# Altium PCB PA_Channel_SUP_CTRL_v1.1.PcbDoc (part 1 of 2)
Units mil, origin at the board's own origin, x right, y up, seen from the top; angles counter-clockwise.
Board outline 7464.6 x 1234.28 mil, 2 copper layers (Top Layer, Bottom Layer), stack 61.855 mil thick; 26 components, 28 nets, 132 pads, 178 vias.
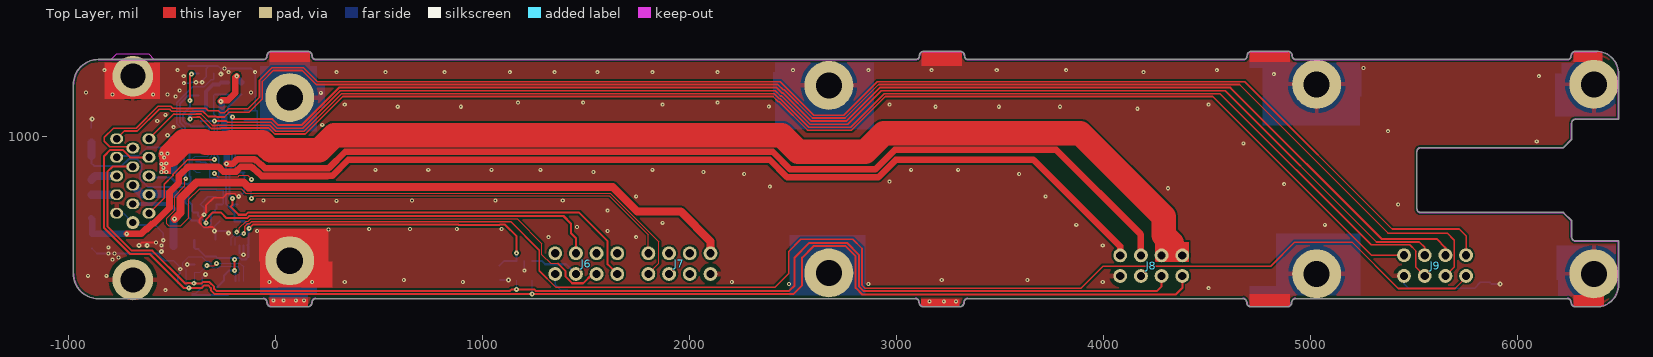
[diagram p0: Top Layer view]
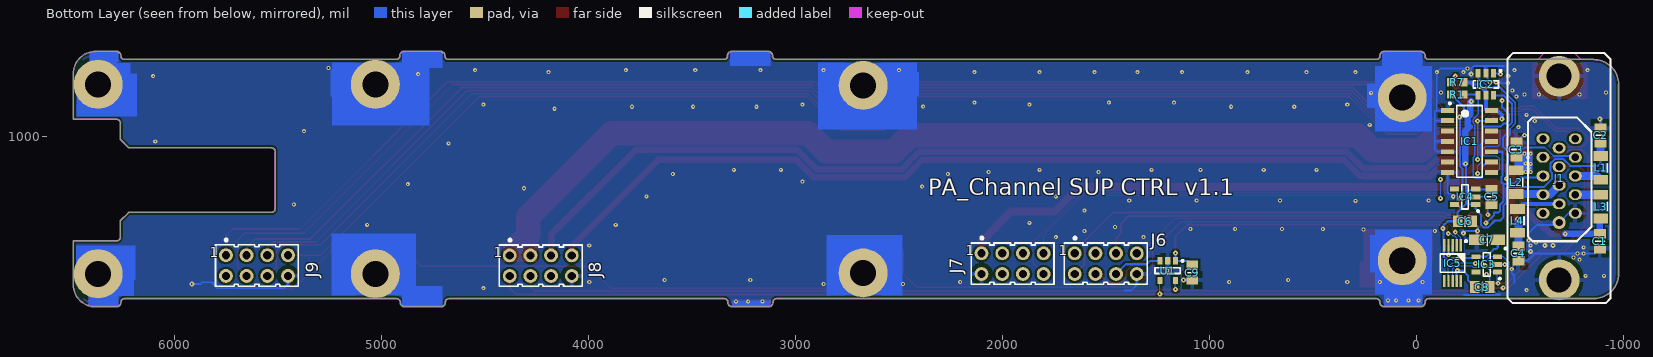
[diagram p1: Bottom Layer view, seen from below]
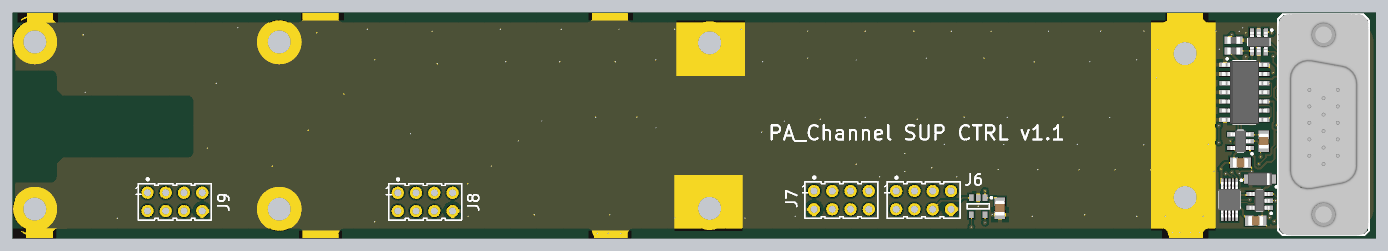
[diagram p2: 3D render of the assembled board from below, using the file's embedded part models]

## Layer stack, top to bottom
Top Solder: solder mask 0.4, Solder Resist, Dk 3.5
Top Layer: signal copper 1.4
Dielectric 1: dielectric 59.0551, FR-4, Dk 4.8
Bottom Layer: signal copper 1.4
Bottom Solder: solder mask 0.4, Solder Resist, Dk 3.5

## Board outline
-19.69,175.18 cw(c-19.69,196.85) -41.35,196.85 cw(c-39.37,196.85) -41.35,196.87 ccw(c-59.06,196.85) -59.06,214.55 cw(c-59.06,216.54) -59.08,214.55 -856.3,214.55 cw(c-856.3,334.65) -975.87,323.46 cw(c-974.41,324.8) -976.39,324.8 -976.39,1250 cw(c-856.3,1250) -856.3,1370.09 -59.06,1370.09 cw(c-59.06,1368.11) -59.03,1370.09 cw(c-59.06,1387.8) -59.06,1370.09 -59.03,1370.09 ccw(c-59.06,1387.8) -41.35,1387.78 cw(c-39.37,1387.8) -41.35,1387.8 cw(c-19.69,1387.8) -22.48,1409.28 cw(c-21.65,1407.48) -21.65,1409.46 155.51,1409.46 cw(c155.51,1387.8) 177.18,1387.8 cw(c175.2,1387.8) 177.18,1387.78 ccw(c194.88,1387.8) 194.86,1370.09 cw(c194.88,1368.11) 194.88,1370.09 3092.52,1370.09 ccw(c3092.52,1387.8) 3110.22,1387.78 cw(c3112.2,1387.8) 3110.22,1387.8 cw(c3131.89,1387.8) 3129.09,1409.28 cw(c3129.92,1407.48) 3129.92,1409.46 3307.09,1409.46 cw(c3307.09,1387.8) 3328.76,1387.8 cw(c3326.77,1387.8) 3328.76,1387.78 cw(c3346.46,1387.8) 3328.76,1387.8 3328.76,1387.78 ccw(c3346.46,1387.8) 3346.46,1370.09 4675.2,1370.09 ccw(c4675.2,1387.8) 4692.9,1387.78 cw(c4694.88,1387.8) 4692.9,1387.8 cw(c4714.57,1387.8) 4711.77,1409.28 cw(c4712.6,1407.48) 4712.6,1409.46 4889.76,1409.46 cw(c4889.76,1387.8) 4911.43,1387.8 cw(c4909.45,1387.8) 4911.43,1387.78 cw(c4929.13,1387.8) 4911.43,1387.8 4911.43,1387.78 ccw(c4929.13,1387.8) 4929.13,1370.09 6240.16,1370.09 ccw(c6240.16,1387.8) 6257.86,1387.78 ccw(c6240.16,1387.8) 6257.86,1387.8 cw(c6279.53,1387.8) 6279.53,1409.46 6380.9,1409.46 cw(c6380.9,1302.16) 6488.2,1302.16 6488.2,1082.68 cw(c6486.22,1082.68) 6486.22,1080.69 6279.53,1080.69 ccw(c6279.53,1062.99) 6261.83,1062.99 cw(c6259.84,1062.99) 6261.83,1062.97 6261.83,984.25 cw(c6259.84,984.25) 6261.23,982.84 6261.25,982.85 6221.87,943.48 6221.89,943.49 cw(c6220.47,944.88) 6220.47,942.9 5531.5,942.9 ccw(c5531.5,925.2) 5513.79,925.2 5513.79,649.61 ccw(c5531.5,649.61) 5531.5,631.9 6220.47,631.9 cw(c6220.47,629.92) 6221.89,631.31 6221.87,631.32 6261.25,591.95 6261.23,591.97 cw(c6259.84,590.55) 6261.83,590.55 6261.83,511.81 ccw(c6279.53,511.81) 6279.53,494.11 6486.22,494.11 cw(c6486.22,492.13) 6488.2,492.13 cw(c6486.22,492.13) 6488.2,492.1 6488.2,334.65 cw(c6486.22,334.65) 6488.2,334.65 ccw(c6486.22,334.65) 6488.2,334.67 6488.2,334.65 6488.2,281.1 cw(c6486.22,281.1) 6487.92,280.08 cw(c6382,281.1) 6382,175.18 6279.53,175.18 cw(c6279.53,196.85) 6257.86,196.85 cw(c6259.84,196.85) 6257.86,196.87 ccw(c6240.16,196.85) 6240.16,214.55 4927.17,214.55 ccw(c4927.17,196.85) 4909.46,196.87 cw(c4907.48,196.85) 4909.46,196.85 cw(c4887.8,196.85) 4890.59,175.36 cw(c4889.76,177.17) 4889.76,175.18 4712.6,175.18 cw(c4712.6,196.85) 4690.93,196.85 cw(c4692.91,196.85) 4690.93,196.87 cw(c4673.23,196.85) 4690.93,196.85 4690.93,196.87 ccw(c4673.23,196.85) 4673.23,214.55 3344.49,214.55 ccw(c3344.49,196.85) 3326.79,196.87 ccw(c3344.49,196.85) 3326.79,196.85 cw(c3305.12,196.85) 3307.91,175.36 cw(c3307.09,177.17) 3307.09,175.18 3129.92,175.18 cw(c3129.92,196.85) 3108.25,196.85 cw(c3110.24,196.85) 3108.25,196.87 ccw(c3090.55,196.85) 3090.55,214.55 194.88,214.55 ccw(c194.88,216.54) 194.9,214.55 194.88,214.55 ccw(c194.88,196.85) 177.18,196.87 cw(c175.2,196.85) 177.18,196.85 cw(c155.51,196.85) 158.31,175.36 cw(c157.48,177.17) 157.48,175.18

## Design rules (kind name [scope] priority, off if disabled: settings)
AcuteAngle [All] p1: minimum=6.00000000000000E+0001 checktracksonly=FALSE
Clearance Clearance_poly [(InPolygon)] p1: gap=10 ignorepadtopadclearanceinfootprint=FALSE except(0: Arc-Hole Track-Hole SMDPad-Hole THPad-Hole Via-Hole Fill-Hole Poly-Hole Region-Hole Text-Hole)
Clearance [All] p2: gap=6 ignorepadtopadclearanceinfootprint=FALSE except(0: Arc-Hole Track-Hole SMDPad-Hole THPad-Hole Via-Hole Fill-Hole Poly-Hole Region-Hole Text-Hole)
ComponentClearance [All] p1 off: gap=10 collisioncheckmode=3 verticalgap=10 showdistances=FALSE
DiffPairsRouting [All] p1: maxlimit=20 minlimit=15 mostfreqgap=17 toplayer_minwidth=15 toplayer_maxwidth=15 toplayer_prefwidth=15 bottomlayer_minwidth=15 bottomlayer_maxwidth=15 bottomlayer_prefwidth=15 maxuncoupledlength=500
Height [All] p1 off: minheight=0 maxheight=1000 prefheight=500
HoleSize [All] p1: absolutevalues=TRUE maxlimit=200 minlimit=1 maxpercent=80.000 minpercent=20.000
MinimumSolderMaskSliver [All] p1: minsoldermaskwidth=0
MinimumSolderMaskSliver SilkscreenOverComponentPads [All] p2: minsoldermaskwidth=0
PlaneClearance [All] p1: clearance=8
PlaneConnect PlaneConnect_pad [(InPadClass('All Pads'))] p1: planeconnectstyle=Relief reliefexpansion=20 reliefentries=4 reliefconductorwidth=10 reliefairgap=10
PlaneConnect [All] p2: planeconnectstyle=Direct reliefexpansion=20 reliefentries=4 reliefconductorwidth=10 reliefairgap=10
PolygonConnect PolygonConnect_pad [(InPadClass('All Pads'))] p1: connectstyle=Relief reliefconductorwidth=20 reliefentries=4 polygonreliefangle="90 Angle" airgapwidth=20
PolygonConnect PolygonConnect_pad_1 [HasFootprint('No Footprint')] p2: connectstyle=Relief reliefconductorwidth=20 reliefentries=4 polygonreliefangle="90 Angle" airgapwidth=20
PolygonConnect [All] p3: connectstyle=Direct reliefconductorwidth=10 reliefentries=4 polygonreliefangle="90 Angle" airgapwidth=10
RoomDefinition "PA_Channel_SUP_CTRL v1.1" [InComponentClass('PA_Channel_SUP_CTRL v1.1')] p1 off: confinementstyle=ConfineIn formatcopy=TRUE lockcomponents=FALSE outline -1747.09,-3039.88 252.91,-3039.88 252.91,-2039.88 -1747.09,-2039.88
RoutingVias [All] p1: holewidth=7.87 width=19.68 viastyle="Through Hole" minholewidth=7.87 minwidth=19.68 maxholewidth=19.68 maxwidth=39.37
SilkToSilkClearance [All] p1: silktosilkclearance=0
SilkToSolderMaskClearance [IsPad] p1: minsilkscreentomaskgap=1 clearancetoexposedcopper=TRUE
SolderMaskExpansion [All] p1: expansion=4
ViasUnderSMD ViasUnderSMD_allow [InComponent('IC18') or InComponent('IC10') or InComponent('IC13') or InComponent('IC14') or InComponent('IC15')] p1: allowed=TRUE
ViasUnderSMD [All] p2: allowed=FALSE
Width Width_1 [(InDifferentialPairClass('All Differential Pairs'))] p1: maxlimit=8 minlimit=8 preferedwidth=8
Width [All] p2: maxlimit=236.22 minlimit=6 preferedwidth=10
21 further rules are at their usual default settings.

## Components (designator, comment, footprint, x,y, rotation, side; value= is the part's Value field where it differs from the comment)
C1 "1uF" CAPC2012X110N -885.83,492.13 r90 bottom
C2 "1uF" CAPC2012X110N -889.23,1003.94 r270 bottom
C3 "1uF" CAPC2012X110N -482.28,935.04 r270 bottom
C4 "1uF" CAPC2012X110N -492.13,433.07 r90 bottom
C5 "1uF" CAPC2012X140N -362.2,706.69 r90 bottom
C6 "1uF" CAPC2012X140N -234.25,588.58 r0 bottom
C7 "10uF" CAPMP3216X180N -341,499 r0 bottom
C8 "1uF" CAPC2012X140N -317.48,271 r0 bottom
C9 "1uF" CAPC2012X140N 1083,340 r90 bottom
IC1 "SN74LVC32AD" SOIC127P600X175-14N -255.91,974.41 r180 bottom
IC2 "SN74LVC2G04DBVR" SOT95P280X145-6N -334.65,1250 r270 bottom
IC3 "24AA02E48T-I/OT" SOT95P280X145-5N -339,380 r0 bottom
IC4 "NCP703SN33T1G" SOT95P275X110-5N -234.25,706.69 r0 bottom
IC5 "AD5627RBRMZ-1" SOP50P490X110-10N -174,386 r270 bottom
J1 "HD-Sub" TYCO_5750489-1 -688.98,797.24 r90 bottom locked
J6 "Header 8" ZL2019-8_MIRR 1501.18,383.86 r180 top locked
J7 "Header 8" ZL2019-8_MIRR 1951.18,383.86 r180 top locked
J8 "Header 8" ZL2019-8_MIRR 4230.32,374.02 r180 top locked
J9 "Header 8" ZL2019-8_MIRR 5601.18,374.65 r180 top locked
L1 "600R@100MHz" INDC3216X130N -889.23,846.46 r270 bottom
L2 "600R@100MHz" INDC3216X130N -482.28,777.56 r90 bottom
L3 "600R@100MHz" INDC3216X130N -889.23,659.45 r90 bottom
L4 "600R@100MHz" INDC3216X130N -487.65,590.55 r270 bottom
R1 "0" RESC1608X55N -196.85,1200.79 r180 bottom
R7 "0" RESC1608X55N -196.85,1259.84 r0 bottom
U1 "MCP3221A5T-I/OT" SOT-23-OT5_L 1202,350 r270 bottom

## Footprints (in the part's own frame and the unit in brackets; to place one, negate y for a bottom-side part, rotate by r counter-clockwise, add the part's x,y. Pads: shape width x height; smd on the part's side, far side on the other; paste and mask are expansions set on the pad)
CAPC2012X110N [mm] "Chip Capacitor, Body 2.0x1.25mm, IPC Medium Density"
  rect 1.15x1.45 smd: 1(-0.9,0) 2(0.9,0)
  silkscreen extent 0,-0.58 0,0.58, body extent -1.05,-0.67 1.05,0.68, height 1.1
CAPC2012X140N [mm] "Chip Capacitor, Body 2.0x1.25mm, IPC Medium Density"
  rect 1.15x1.45 smd: 1(-0.9,0) 2(0.9,0)
  silkscreen extent 0,-0.58 0,0.58, body extent -1.05,-0.67 1.05,0.68, height 1.3
CAPMP3216X180N [mm] "Capacitor, Polarized, Molded  Body 3.2x1.6mm, IPC Medium Density"
  rect 1.8x1.25 smd: 1(-1.3,0) 2(1.3,0)
  silkscreen extent -2.4,-0.7 0,1.2, body extent -1.7,-0.9 1.7,0.9, height 1.6
INDC3216X130N [mm] "Chip Inductor, EIA 1206, Metric 3216, 3.20mm L X 1.60mm W, IPC Medium Density"
  rect 1.2x1.8 smd: 1(-1.45,0) 2(1.45,0)
  silkscreen extent -0.5,-0.8 0.5,0.8, body extent -1.7,-0.9 1.7,0.9, height 1.3
RESC1608X55N [mm] "Chip Resistor, EIA 0603, Metric 1608, Body 1.6x0.8mm, IPC Medium Density"
  rect 0.9x1 smd: 1(-0.8,0) 2(0.8,0)
  body extent -0.87,-0.47 0.88,0.48, height 0.55
SOIC127P600X175-14N [mm] "SOIC 14, Pitch 1.27mm - Body 4x8.75mm, IPC Medium Density"
  rect 1.55x0.6 smd: 1(-2.7,3.81) 2(-2.7,2.54) 3(-2.7,1.27) 4(-2.7,0) 5(-2.7,-1.27) 6(-2.7,-2.54) 7(-2.7,-3.81) 8(2.7,-3.81) 9(2.7,-2.54) 10(2.7,-1.27) 11(2.7,0) 12(2.7,1.27) 13(2.7,2.54) 14(2.7,3.81)
  silkscreen extent -2.53,-4.4 1.55,4.78, body extent -3.1,-4.37 3.1,4.38, height 1.75
SOP50P490X110-10N [mm] "MSOP, 10-Leads, Body 3.1x3.1mm (max), Pitch 0.50mm, IPC Medium Density"
  rect 1.5x0.3 smd: 1(-2.2,1) 2(-2.2,0.5) 3(-2.2,0) 4(-2.2,-0.5) 5(-2.2,-1) 6(2.2,-1) 7(2.2,-0.5) 8(2.2,0) 9(2.2,0.5) 10(2.2,1)
  silkscreen extent -2.82,-1.5 1.12,1.77, body extent -2.45,-1.55 2.45,1.55, height 1.1
SOT95P275X110-5N [mm] "SOT, 0.95mm Pitch; 5 Pin, 1.50mm W X 3.00mm L X 1.10mm H Body, IPC Medium Density"
  rect 1.15x0.6 smd: 1(-1.3,0.95) 2(-1.3,0) 3(-1.3,-0.95) 4(1.3,-0.95) 5(1.3,0.95)
  silkscreen extent -1.72,-1.5 0.4,1.87, body extent -1.37,-1.5 1.37,1.5, height 1.1
SOT95P280X145-5N [mm] "SOT, 0.95mm pitch; 5 pin, 1.60mm W X 2.90mm L X 1.45mm H body, IPC Medium Density"
  rect 1.1x0.6 smd: 1(-1.3,0.95) 2(-1.3,0) 3(-1.3,-0.95) 4(1.3,-0.95) 5(1.3,0.95)
  silkscreen extent -1.72,-1.45 0.43,1.87, body extent -1.4,-1.5 1.4,1.5, height 1.45
SOT95P280X145-6N [mm] "SOT23, 6-Leads, Body 1.6x3.0mm, Pitch 0.95mm, IPC Medium Density"
  rect 1.05x0.6 smd: 1(-1.35,0.95) 2(-1.35,0) 3(-1.35,-0.95) 4(1.35,-0.95) 5(1.35,0) 6(1.35,0.95)
  silkscreen extent -1.77,-1.55 0.45,1.92, body extent -1.4,-1.5 1.4,1.5, height 1.45
SOT-23-OT5_L [mm] "SOT23, 5-Leads, Body 2.9x1.7mm, Pitch 0.95mm, Lead Span 2.8mm, IPC High Density"
  rect 0.9x0.65 smd: 1(-1.2,0.95) 2(-1.2,0) 3(-1.2,-0.95) 4(1.2,-0.95) 5(1.2,0.95)
  silkscreen extent -1.32,-1.55 0.35,1.95, body extent -0.9,-1.55 0.9,1.55, height 1.45
TYCO_5750489-1 [mm]
  oval 1.3x1.6 hole 0.9: 1(-4.318,1.98) 2(-2.032,1.98) 3(0.254,1.98) 4(2.54,1.98) 5(4.826,1.98) 7(-3.175,0) 8(-0.889,0) 9(1.397,0) 10(3.683,0) 11(-4.318,-1.98) 12(-2.032,-1.98) 13(0.254,-1.98) 14(2.54,-1.98) 15(4.826,-1.98)
  round 1.6 hole 0.9: 6(-5.461,0)
  round 5 hole 3.07: 16(12.497,0) 17(-12.497,0)
  silkscreen extent -15.35,-6.3 15.35,6.34, body extent -15.4,-6.25 15.4,6.25, height 12.11
ZL2019-8_MIRR [mm]
  round 1.7 hole 1: 1(-3.81,-1.27) 2(-3.81,1.27) 3(-1.27,-1.27) 4(-1.27,1.27) 5(1.27,-1.27) 6(1.27,1.27) 7(3.81,-1.27) 8(3.81,1.27)
  body extent -5.08,-2.5 5.08,2.54, height 16.4

## Part data
C1 C2 C3 C4: library part CC0805_1UF_50V_10%_X7R, "Non-polarised capacitor", Case=0805, Manufacturer=GENERIC, Manufacturer1 ComponentHeight=1.1mm, Manufacturer1 Example=KEMET, Manufacturer1 Part Number=C0805C105K5RACTU, Tolerance=±10%, Voltage=50V, Author="CERN DEM JLC", Component Type=Standard, CreateDate=04.12.2013, HelpURL=\\cern.ch\dfs\Applications\Altium\Datasheets\CC0805_X7R_KEMET.pdf, LatestRevisionDate=04.12.2013, Manufacturer Part Number=CC0805_1UF_50V_10%_X7R, Mounted=Yes, Part Description="SMD Multilayer Chip Ceramic Capacitor", Part Number=CC0805_1UF_50V_10%_X7R, Pin Count=2, Sense=No, SMD=Yes, Socket=No, Status=Preferred, TC=X7R
C5 C6 C8 C9: library part CC0805_1UF_35V_20%_X7R, "Non-polarised capacitor", Case=0805, Manufacturer=GENERIC, Manufacturer1 ComponentHeight=1.35mm, Manufacturer1 Example="TAIYO YUDEN", Manufacturer1 Part Number=GMK212B7105MG-T, Tolerance=±20%, Voltage=35V, Author="CERN DEM JLC", Component Type=Standard, CreateDate=22.06.2011, HelpURL=\\cern.ch\dfs\Applications\Altium\Datasheets\CC0805_X7R_TAIYO-YUDEN_HIGH-VALUE.pdf, LatestRevisionDate=22.06.2011, Manufacturer Part Number=CC0805_1UF_35V_20%_X7R, Mounted=Yes, Part Description="SMD Multilayer Chip Ceramic Capacitor", Part Number=CC0805_1UF_35V_20%_X7R, Pin Count=2, Sense=No, SMD=Yes, Socket=No, Status="Not Recommended", TC=X7R
C7: library part CTE3216-18_10UF_16V_20%_AVX_TCJ, "Polarised capacitor", Case=A, Manufacturer=AVX, Manufacturer Part Number=TCJA106M016R0200, Tolerance=±20%, Voltage=16V, Author="CERN DEM JLC", ComponentHeight=1.8mm, Component Type=Standard, CreateDate=29.03.2012, HelpURL=\\cern.ch\dfs\Applications\Altium\Datasheets\CTE_AVX_TCJ.pdf, LatestRevisionDate=29.03.2012, Mounted=Yes, Part Description="ESR 0R200 Tantalum Solid Electrolytic Chip Capacitor with Conductive Polymer Electrode", Part Number=CTE3216-18_10UF_16V_20%_AVX_TCJ, Pin Count=2, Sense=No, SMD=Yes, Socket=No, Status=Preferred
IC1: "Quad 2-Input OR Gate", Case=SOIC14, Manufacturer="TEXAS INSTRUMENTS", Author="CERN DEM JLC", Bonding=No, ComponentHeight=1.75mm, Component Type=Standard, CreateDate=21.03.2012, Device=SN74LVC32AD, HelpURL=\\cern.ch\dfs\Applications\Altium\Datasheets\SN74LVC32AD.pdf, LatestRevisionDate=21.03.2012, Manufacturer Part Number=SN74LVC32AD, Mounted=Yes, PackageDescription="SOIC 14, Pitch 1.27mm - Body 4x8.75mm, IPC Medium Density", Part Description="Quad 2-Input Positive-OR Gate", Part Number=SN74LVC32AD, Pin Count=14, PressFit=No, Sense=No, SMD=Yes, Socket=No
IC2: "Dual Inverter Buffer", Case=SOT23-6, Manufacturer="TEXAS INSTRUMENTS", Author="CERN DEM JMW", Bonding=No, ComponentHeight=1.45mm, Component Type=Standard, CreateDate=26.08.2016, Device=SN74LVC2G04DBVR, HelpURL=\\cern.ch\dfs\Applications\Altium\Datasheets\SN74LVC2G04DBVR.pdf, LatestRevisionDate=26.08.2016, Manufacturer Part Number=SN74LVC2G04DBVR, Mounted=Yes, PackageDescription="SOT23, 6-Leads, Body 1.6x3.0mm, Pitch 0.95mm, IPC Medium Density", Part Description="Dual Inverter Gate", Part Number=SN74LVC2G04DBVR, Pin Count=6, PressFit=No, Sense=No, SMD=Yes, Socket=No
IC3: "1.7V-5.5V, 2K I2C Serial EEPROM With EUI-48 Node Identity", Case=SOT23-5, Manufacturer="MICROCHIP TECHNOLOGY", Author="CERN DEM MR", Bonding=No, ComponentHeight=1.45mm, Component Type=Standard, CreateDate=2016-03-31, Device=24AA02E48T-I/OT, HelpURL=\\cern.ch\dfs\Applications\Altium\Datasheets\24AA02E48T-I-OT.pdf, LatestRevisionDate=2016-03-31, Manufacturer Part Number=24AA02E48T-I/OT, Mounted=Yes, PackageDescription="SOT, 0.95mm pitch; 5 pin, 1.60mm W X 2.90mm L X 1.45mm H body, IPC Medium Density", Part Description="1.7V-5.5V, 2K I2C Serial EEPROM With EUI-48 Node Identity", Part Number=24AA02E48T-I/OT, Pin Count=5, PressFit=No, Sense=No, SMD=Yes, Socket=No
IC4: "3.3V 300mA, Ultra-Low Quiescent Current, IQ 12uA, Ultra-Low Noise, LDO Voltage Regulator", Case=SOT23-5, Manufacturer="ON SEMICONDUCTOR", Author="CERN DEM JLC", Bonding=No, ComponentHeight=1.1mm, Component Type=Standard, CreateDate=16.02.2017, Device=NCP703SN33T1G, HelpURL=\\cern.ch\dfs\Applications\Altium\Datasheets\NCP703SN33T1G.pdf, LatestRevisionDate=16.02.2017, Manufacturer Part Number=NCP703SN33T1G, Mounted=Yes, PackageDescription="SOT, 0.95mm Pitch; 5 Pin, 1.50mm W X 3.00mm L X 1.10mm H Body, IPC Medium Density", Part Description="3.3V 300mA, Ultra-Low Quiescent Current, IQ 12uA, Ultra-Low Noise, LDO Voltage Regulator", Part Number=NCP703SN33T1G, Pin Count=5, PressFit=No, Sense=No, SMD=Yes, Socket=No
IC5: "Dual, 12-/14-/16-Bit nanoDACs® with 5 ppm/°C On-Chip Reference, I2C Interface", Case=MSOP10, Manufacturer="ANALOG DEVICES", Author="CERN DEM JLC", Bonding=No, ComponentHeight=1.1mm, Component Type=Standard, CreateDate=18.12.2013, Device=AD5627RBRMZ-1, HelpURL=\\cern.ch\dfs\Applications\Altium\Datasheets\AD5627RBRMZ-1.pdf, LatestRevisionDate=18.12.2013, Manufacturer Part Number=AD5627RBRMZ-1, Mounted=Yes, PackageDescription="TSSOP, 10-Leads, Body 3.2x3.2mm (max), Pitch 0.50mm, IPC Medium Density", Part Description="Dual, 12-Bit nanoDACs® with 5 ppm/°C On-Chip Reference, I2C Interface", Part Number=AD5627RBRMZ-1, Pin Count=10, PressFit=No, Sense=No, SMD=Yes, Socket=No
J1: "Connector High Density D-sub 15 Male", Manufacturer="TYCO ELECTRONICS", Manufacturer Part Number=5750489-1, Part Number=TYCO_5750489-1, Author=GK, ComponentHeight=12.75mm, Component Type=Standard, CreateDate=26.06.2013, Family=HD-Sub, HelpURL=\\cern.ch\dfs\Applications\Altium\Datasheets\TYCO_1-1734530-1.pdf, LatestRevisionDate=26.06.2013, Mounted=Yes, Part Description="15 Male Contacts, Straight High Density D-SUB Connector, AMPLIMITE HD-22 Serie", Pin Count=17, PressFit=No, Sense=No, SMD=No, Socket=No, Status=None
J6 J7 J8 J9: "Connector 8 Male", Manufacturer=NINIGI, Manufacturer Part Number=ZL2019-8, Author=GK, ComponentHeight=19.4, Component Type=Standard, CreateDate=08.03.2017, Family="Header 8", HelpURL=\\cern.ch\dfs\Applications\Altium\Datasheets\SAMTEC_TSW-104-23-L-D.pdf, LatestRevisionDate=08.03.2017, Mounted=Yes, Part Description="8 Contacts, Pitch 2.54mm, Dual Row  Through Mount Straight Header (Post Lead 5.84mm, Tail Lead 2.92mm, Insulator 2.54mm)", Part Number=ZL2019-8, Pin Count=8, PressFit=No, Sense=No, SMD=No, Socket=No, Status=None
L1 L2 L3 L4: library part IND1206_WURTH_74279218, "Inductor", Case=1206, Manufacturer="WURTH ELEKTRONIK", Manufacturer Part Number=74279218, Power=2A, Resistance=0.1R, Tolerance=±25%, Author="CERN DEM JLC", ComponentHeight=1.3mm, Component Type=Standard, CreateDate=24.01.2012, HelpURL=\\cern.ch\dfs\Applications\Altium\Datasheets\IND1206_WURTH_74279218.pdf, LatestRevisionDate=24.01.2012, Mounted=Yes, Part Description="SMD EMI Suppression Chip Ferrite Bead (WE-CBF Series)", Part Number=IND1206_WURTH_74279218, Pin Count=2, Sense=No, SMD=Yes, Socket=No, Status=None
R1 R7: library part R0603_0R_JUMPER, "Resistor", Case=0603, Manufacturer=GENERIC, Manufacturer1 ComponentHeight=0.55mm, Manufacturer1 Example="NIC COMPONENT", Manufacturer1 Part Number=NRC06Z0, Author="CERN DEM JLC", Component Type=Standard, CreateDate=03.12.2007, HelpURL=\\cern.ch\dfs\Applications\Altium\Datasheets\R0603_NIC_NRC.pdf, LatestRevisionDate=13.03.2008, Manufacturer Part Number=R0603_0R_JUMPER, Mounted=Yes, Part Description="1A (0.05R Max DC Resistance) Zero Ohm Jumper", Part Number=R0603_0R_JUMPER, Pin Count=2, PressFit=No, Sense=No, SMD=Yes, Socket=No, Status=Preferred
U1: library part CMP-0188-00733-2, "Low Power 12-Bit A/D Converter With I2C Interface, 5-Pin SOT-23, Industrial Temperature, Tape and Reel", Code_IPC=SOT23-5, ComponentLink1Description="Manufacturer URL", ComponentLink1URL=http://www.microchip.com/, ComponentLink2Description=Datasheet, ComponentLink2URL=http://ww1.microchip.com/downloads/en/DeviceDoc/21732c.pdf, ComponentLink3Description="Package Specification", ComponentLink3URL=http://www.microchip.com/stellent/groups/techpub_sg/documents/packagingspec/en012702.pdf, DatasheetVersion="revC, Jul-2006", PackageDescription="5-Lead Plastic Small Outline Transistor (OT) [SOT-23]", PackageReference=SOT-23-OT5, PackageVersion="revBB, Aug-2009", RevisionNote="URLs added."

## Free pads (board coordinates)
  round 236.22 hole 125.98 unplated: 0(5029.53,334.65) 5(5029.53,1250) 7(6368.11,334.65) 10(6368.11,1250) 14(69,398) 14(69,1186)
  round 236.22 hole 125.98: 15(2673,339) 15(2673,1245)

## Via types
v1: diameter 19.68, hole 7.87, Top Layer to Bottom Layer, tented both sides, 132 vias
v2: diameter 23.62, hole 7.87, Top Layer to Bottom Layer, tented both sides, 46 vias

## Nets (pads, with @x,y where several pads share a name; then routed paths per layer and width w, separated by ;. In a path a pad name is that pad's centre, name@x,y a point inside that pad or via, vN(x,y) a via of type N, cw(c..) or ccw(c..) an arc to the next point about the centre after c; other vN are vias at no path point)
ADL_Q: IC1.10 J1.3 J6.5 | length 2640.3
  Top Layer w10: v2(-334.64,580.71) -334.64,597.66 -321.68,610.63 -321.68,613.36 -305.12,629.92 -262.57,629.92 -236.73,604.08 -136.14,604.08 -126.32,613.9 1391.13,613.9 1427.03,578 1427.03,531.63 1451.18,507.48 J6.5
  Bottom Layer w10: J1.3 -611.02,800.02 -504.75,800.02 -475.82,771.09 -435.67,771.09 -432.62,768.04 -420.17,768.04 -419.84,767.72 ; IC1.10 -414.17,924.41 -415.97,922.61 -415.97,809.06 -410.26,803.35 -410.26,777.95 -419.84,768.37 -419.84,767.72 ; v2(-334.64,580.71) -337.38,580.71 -374.02,617.35 -374.02,629.92 -393.7,629.92 -403.54,639.76 -403.54,669.76 -419.84,686.06 -419.84,767.72
ALERT: J8.6
FR_PWR: J1.5 J9.6 | length 6869.6
  Top Layer w8: J1.5 -491.75,1106.52 -490.2,1106.52 -489.25,1105.57 -386.18,1105.57 -385.23,1106.52 -359.81,1106.52 -304.31,1051.02 -286.24,1051.02 -284.5,1052.76 -27.24,1052.76 1.79,1023.73 137.79,1023.73 319,1204.94 2408.77,1204.94 2433.88,1179.84 2439.02,1179.84 2575.84,1043.02 2778.27,1043.02 2940.2,1204.94 4562.77,1204.94 5293.07,474.65 5479.45,474.65 5509.58,444.51 5507.72,442.65 5507.72,367.64 5511.18,364.17 5511.65,364.17 J9.6
FR_Q: IC1.13 J1.1 J9.5 | length 7144.2
  Top Layer w8: J1.1 -537.56,700.71 -537.56,767.26 -494.92,809.9 -494.92,815.93 -425.02,885.83 -295.28,885.83 -295,886.1 v2(-295,887) ; v2(-295.28,1072.83) -237.54,1072.83 -231.47,1066.76 -21.45,1066.76 7.59,1037.73 131.99,1037.73 313.21,1218.94 2414.57,1218.94 2439.68,1193.84 2444.82,1193.84 2581.64,1057.02 2763.79,1057.02 2925.72,1218.94 4588.14,1218.94 5318.44,488.65 5525.13,488.65 5551.18,462.6 J9.5
  Bottom Layer w8: IC1.13 -360.63,1072.83 v2(-295.28,1072.83) -295.53,1072.58 -295.53,885.83 -295,886.35 v2(-295,887)
FR_RST: J6.2 J9.3 R1.1 | length 9111.9
  Top Layer w10: v2(-208.16,698.91) -208.16,667.83 -216.54,659.45 -177.17,620.08 -142.77,620.08 -132.95,629.9 1466.56,629.9 1604.33,492.13 1604.33,380.87 1651.18,334.02 J6.2 ; v2(-206.69,1092.52) -206.69,1084.54 -203.92,1081.76 -15.23,1081.76 13.8,1052.73 125.78,1052.73 306.99,1233.94 2420.79,1233.94 2445.89,1208.84 2451.03,1208.84 2587.86,1072.02 2757.58,1072.02 2919.51,1233.94 4612.51,1233.94 5342.81,503.65 5608.56,503.65 5651.18,461.02 J9.3
  Bottom Layer w10: v2(-208.16,698.91) -208.16,701.63 -221.69,715.17 -221.69,842.84 -209.47,855.06 -209.47,1091.94 -229.16,1111.62 -229.16,1138.9 -167.27,1200.79 R1.1
FR_VREF: IC5.2 J9.2 | length 6794.2
  Top Layer w7.87: v2(-153,529) -148.75,533.25 -148.75,563.01 -136.01,575.75 -126.38,575.75 -115.16,586.96 1136.04,586.96 1274.06,448.94 1274.06,349.6 1354.66,269 2412,269 2479,336 2479,443 2537,501 2789,501 2833.05,456.95 2833.05,279.95 2847.35,265.65 3890.65,265.65 3997,372 4808,372 4924,488 5200,488 5424,264 5698,264 5751.18,317.18 J9.2
  Bottom Layer w6: IC5.2 -193.69,507.32 -185.81,515.19 -178.38,515.19 -164.57,529 v2(-153,529)
GND: C1.1 C2.1 C3.1 C4.1 C5.1 C6.1 C7.2 C8.1 C9.1 IC1.1 IC1.2 IC1.4 IC1.5 IC1.7 IC2.2 IC3.2 IC4.2 IC5.3 IC5.4 J1.6 J1.11 J1.16 J1.17 J6.8 J7.2 J8.8 J9.8 pad.0 pad.5 pad.7 pad.10 pad.14 pad.15 U1.2 | length 4494.2
  Top Layer w8: v2(-659.45,472.44) -645.73,486.16 -620.08,486.16 ; v2(-620.08,472.44) -620.08,486.16 ; v1(-576.89,486.16) -620.08,486.16 ; v2(-295.28,541.34) -295.28,553.15 -303.15,561.02 -323.48,561.02 -325.61,558.9 -345.09,558.9 -366.91,580.71 -366.91,597.66 v2(-344.49,620.08) -335.62,628.94 -335.62,665.36 -298.13,702.85 -253.19,702.85 -235.32,720.72 -196.33,720.72 -186.34,710.74 -186.34,706.22 -182.97,702.85 v2(-177.17,708.66)
  Bottom Layer w8: C2.1 -889.23,1079.27 v2(-885.83,1082.68) ; C1.1 -862.2,433.07 v1(-807.09,433.07) v1(-777.56,433.07) -561.02,433.07 -561.02,423.23 -535.43,397.64 C4.1 -460,365.51 v1(-460,357) -460,337.24 -472.44,324.8 -472.44,290.6 ; J1.11 -733.98,627.24 J1.6 -677.6,570.87 -580.71,570.87 -542,532.16 v1(-542,497) -542,452.09 v2(-551.18,442.91) ; v2(-521.65,1003.94) -515.75,1003.94 C3.1 ; v1(-442.25,1255.64) -409.72,1255.64 -405.51,1259.84 v2(-383.86,1259.84) ; v2(-426,380) IC3.2 ; -423.23,1338.58 -320.87,1338.58 ; -403,232 -402.54,232.46 -229.54,232.46 -229,233 ; -403,238 -385.91,238 C8.1 -352.91,317.09 v2(-338,332) ; v2(-354.33,1259.84) -354.33,1267.72 -334.65,1287.4 IC2.2 -334.65,1324.8 -320.87,1338.58 ; v2(-344.49,620.08) -344.49,653.54 C5.1 -326.77,706.69 IC4.2 ; C7.2 -289.82,535.88 v2(-295.28,541.34) ; C6.1 -295.28,562.99 v2(-295.28,541.34) ; v2(-263.78,1299.21) -263.78,1326.77 ; v2(-226.38,531.5) -236.22,541.34 v2(-295.28,541.34) ; IC5.3 -174,435 -165.69,426.68 v2(-154.32,426.68) IC5.4 ; IC1.4 -88.58,974.41 ; IC1.2 -90.16,1074.41 -88.58,1072.83 ; IC1.1 -147.24,1122.05 -98.43,1122.05 ; C9.1 v2(1125.57,304.57) ; v1(1202,350) U1.2 ; J6.8 1351.18,282.68 1379.4,254.46 1411.12,254.46 ; J9.8 5451.18,287.01 5462.6,275.59 5472.44,265.75 5792.28,265.75 5819.84,293.31 5866.14,293.31 5874.02,285.43 v2(5915.35,285.43) ; -320.87,1338.58 -275.59,1338.58 -263.78,1326.77 ; -263.78,1326.77 v1(-246.06,1326.77) -116.14,1326.77 v1(-98.43,1309.06) -98.43,1122.05 ; v2(-177.17,708.66) -177.17,697.04 v2(-177.17,708.66) ; v2(-177.17,708.66) -163.54,722.28 -156.29,722.28 -150.43,728.14 -150.43,796.42 -149.61,797.24 -149.61,808.66 -157.48,816.54 IC1.7 -192.52,824.41 -194.88,826.77 -194.88,848.44 -194.47,848.85 -194.47,917.73 -187.01,925.2 -186.22,924.41 IC1.5 -99.21,924.41 -88.58,935.04 -88.58,974.41 ; -98.43,1122.05 -88.58,1122.05 -88.58,1072.83 ; -88.58,974.41 -88.58,1072.83
  other v1: 3159.45,201.69 3228.87,201.69 3287.4,201.69 -9.84,206.69 39.37,206.69 98.43,206.69 137.8,206.69 -531.5,255.91 4507.87,265.75 2480.32,285.43 2864.17,285.43 -29.53,295.28 177.17,295.28 334.65,295.28 905.51,295.28 2204.72,295.28 3996.06,295.28 620.08,305.12 3218.5,305.12 3631.89,305.12 -905.51,324.8 -816.93,324.8 -787.4,403.54 -757.87,413.39 -807.09,462.6 -551.18,472.44 3996.06,472.44 1318.9,511.81 1742.13,511.81 -88.58,541.34 1604.33,541.34 256,549 452.76,551.18 649.61,551.18 875.98,551.18 1092.52,551.18 1456.69,561.02 3868.11,570.87 5068.9,570.87 1870.08,580.71 1604.33,639.76 5423.23,669.29 295,687 -58.53,688.98 659.45,688.98 1062,689 1387.8,688.98 1742.13,708.66 3720.47,708.66 4311.02,748.03 2388,756 4872.05,767.72 2966,780 2263.78,816.93 3592.52,816.93 1535.43,826.77 2066.93,826.77 482.28,836.61 738.19,836.61 1043.31,836.61 1279.53,836.61 1820.87,836.61 3070.87,836.61 3297.24,836.61 4675.2,964.57 6092.52,974.41 5374.02,1023.62 -492.12,1043.31 226,1054 -570.87,1072.83 -531.5,1102.36 4163.39,1131.89 590.55,1141.73 895.67,1141.73 2383,1142 3188.98,1141.73 3494.09,1141.73 3789.37,1141.73 334.65,1151.57 1870.08,1151.57 4507.87,1151.57 2967,1152 1171.26,1161.42 1486.22,1161.42 2135.83,1161.42 -482.28,1190.94 -787.4,1200.79 -590.55,1200.79 -521.65,1200.79 219,1209 -915.35,1210.63 -118.11,1210.63 -462.6,1220.47 -442.91,1289.37 6102.36,1289.37 4822.83,1299.21 -226.38,1309.06 295.28,1309.06 531.5,1309.06 816.93,1309.06 1131.89,1309.06 1348.43,1309.06 1555.12,1309.06 1820.87,1309.06 2135.83,1309.06 4192.91,1309.06 -826.77,1318.9 -472.44,1318.9 2500,1318.9 2864.17,1318.9 3169.29,1318.9 3484.25,1318.9 3818.9,1318.9 4547.24,1318.9 5255.91,1328.74
IN_VREF: IC5.1 J6.4 | length 2044.8
  Top Layer w6: v2(-187,536) -174,536 -173.81,536.19 -173.81,556.24 -141.37,588.68 -131.73,588.68 -120.52,599.9 1167.1,599.9 1287,480 1287,427 1329,385 1364,385
  Top Layer w10: 1364,385 1400,349 1400,322.16 1433.16,289 1486.32,289 1531.18,333.86 J6.4
  Bottom Layer w6: IC5.1 -213.37,509.63 v2(-187,536)
INPWR: J6.6 U1.3 | length 244.3
  Top Layer w6: J6.6 J6.6@1451.18,340.16
  Bottom Layer w10: U1.3 1286.76,397.24 1303,381 1404.04,381 J6.6
N8V0_CH: C1.2 J8.7 L3.1 | length 5597.3
  Top Layer w31.5: v2(-718.5,527.56) -648.94,527.56 -625.32,551.18 -620.08,551.18 -591.35,579.91 -585.51,579.91 -511.81,653.6 -511.81,728.35 -466.63,773.53 -466.63,807.81 -446.97,827.46 -445.33,827.46 -420.23,852.56 -275.67,852.56 -251.75,828.64 -190.08,828.64 -167.31,851.41 -117.73,851.41 -112.43,846.11 -107.9,846.11 -88.37,826.58 -85.82,826.58 -66.49,807.25 249.62,807.25 250.14,807.78 273.78,807.78 351.83,885.83 2387.15,885.83 2471.47,801.5 2912.53,801.5 2996.85,885.83 3661.42,885.83 4080.32,466.93 J8.7
  Bottom Layer w31.5: L3.1 -885.83,598.96 C1.2 v2(-718.5,527.56)
NetIC1_8: IC1.8 IC1.12 | length 410.5
  Bottom Layer w6: IC1.8 -383.79,824.41 -401.72,842.34 -401.72,889.95 -388.07,903.6 -327.97,903.6 -322.69,908.87 -322.69,939.95 -330.99,948.25 -391.09,948.25 -397.57,954.72 -403.54,954.72 -404.13,955.32 -404.13,1023.03 -402.76,1024.41 IC1.12
NetIC1_9: IC1.9 IC2.4 R1.2 | length 662.5
  Bottom Layer w7.87: IC1.9@-383.86,875.98 -363.78,875.98 IC1.9 -337.09,874.41 -337.09,871.85 -317.02,851.78 -317.02,798.08 -316.75,798.35 -305.11,798.35 -304.01,797.25 -285.99,797.25 -284.89,798.35 -273.25,798.35 -273.25,896.01 -281.59,904.35 -281.59,1055.67 -279.8,1057.46 -279.84,1057.51 -273.53,1063.83 -273.53,1081.84 -297.24,1105.56 IC2.4 -293.31,1200.79 R1.2
NetJ1_2: J1.2 J1.8 L2.1 | length 226.7
  Bottom Layer w39.37: J1.8 -643.98,717.24 J1.2 -607.8,720.47 L2.1
NetJ1_7: J1.7 L4.1 | length 211.5
  Bottom Layer w19.68: J1.7 -512.26,672.24 L4.1
NetJ1_12: J1.12 L3.2 | length 122.6
  Bottom Layer w39.37: L3.2 -767.64,716.54 J1.12
NetJ1_13: J1.13 L1.2 | length 129.7
  Bottom Layer w39.37: L1.2 -871.36,807.24 J1.13
ON_OFF: IC2.3 J1.14 | length 844.1
  Bottom Layer w7.87: J1.14 -760.4,903.77 -661.19,903.77 -620.08,944.88 -521.93,944.88 -514.94,937.9 -465.46,937.9 -462.6,935.04 -452.48,935.04 -443.8,943.72 -443.8,943.99 -433.07,954.72 -433.07,987.8 -451.13,1005.86 -451.13,1034.57 -476.98,1060.41 -476.98,1161.05 -399.93,1238.09 -345.32,1238.09 -310.87,1272.54 -302.26,1272.54 -297.24,1277.56 IC2.3
P3V3: C6.2 C7.1 C8.2 C9.2 IC3.4 IC4.5 IC5.5 IC5.9 J8.5 R7.2 U1.1 | length 8007.2
  Top Layer w10: v2(-197,350) v2(-197,404) ; v2(-127,554) -108.98,572.02 884.62,572.02 886.64,570 1081.86,570 1083.89,572.02 1108.98,572.02 1164.6,516.4 v2(1164.6,434.4)
  Top Layer w31.5: v2(-263.69,1167.97) -258.45,1173.2 -229.16,1173.2 -193.31,1209.05 -193.31,1283.07 v2(-187.01,1289.37) ; v2(-236.22,866.14) -205.61,866.14 -182.84,888.91 -102.2,888.91 -96.9,883.61 -92.37,883.61 -72.84,864.08 -70.29,864.08 -50.96,844.75 234.09,844.75 234.61,845.28 258.25,845.28 337.17,924.2 2401.8,924.2 2487,839 2897,839 2990.98,932.98 3771.75,932.98 4180.32,524.41 J8.5
  Bottom Layer w10: C7.1 -392.18,461.18 -384.72,453.72 -372.37,453.72 -336.05,417.4 IC3.4 -282.1,411.68 v2@-197,411.68 ; C8.2 -248.58,304.46 -248.58,326.18 -224.76,350 v2(-197,350) -193.69,346.68 IC5.9 ; v2(-236.22,866.14) -237.92,867.84 -237.92,670.99 -216.54,649.61 ; v2(-197,404) v2@-197,411.68 ; v2@-197,414.4 v2@-197,411.68 ; IC4.5 -196.85,669.29 -216.54,649.61 ; C9.2 1104.81,397.24 U1.1 v2(1164.6,434.4) ; -216.54,649.61 -198.82,631.89 C6.2 -149.84,588.58 -130.19,568.93 -130.19,477.06 IC5.5 -131.5,469.49 -131.5,417.24 -144.87,403.87 -163.76,403.87 -171.57,411.68 v2@-197,411.68
  Bottom Layer w31.5: v2(-263.69,1167.97) -259.94,1164.22 -259.94,1104.58 -247.84,1092.48 -247.84,1053.19 -254.12,1046.91 -254.12,1046.83 -255.91,1045.04 -236.22,1025.35 v2(-236.22,866.14) ; R7.2@-177.17,1271.65 R7.2
P5V0MP: C2.2 C5.2 IC4.1 IC4.3 L1.1 | length 1285.8
  Bottom Layer w7.87: C5.2 IC4.3@-287.4,742.12 ; IC4.1 -257.87,669.29 -252.86,674.31 -252.86,738.19 -283.47,738.19 IC4.3@-287.4,742.12 ; IC4.3 IC4.3@-287.4,742.12
  Bottom Layer w10: L1.1 -889.23,869.54 -875.98,856.3 -742.57,856.3 -710.04,888.83 -667.91,888.83 -646.48,867.4 -646.48,829.44 -653.52,822.4 -653.52,792.09 -616.53,755.09 -442.29,755.09 -435.85,748.65 -435.85,679.44 -419.54,663.13 -419.54,608.52 -403.54,592.52 -378.72,592.52 -344.09,557.9 -325.2,557.9 -311.83,571.26 -311.83,618.29 -292.33,637.8 -292.32,642.72 -285.43,649.61 IC4.1
  Bottom Layer w39.37: L1.1 C2.2
P6V0_CH: C4.2 J7.1 L4.2 | length 2999.6
  Top Layer w39.37: v2(-487.65,600.39) -458.31,629.73 -458.31,698.51 -381.61,775.21 -167.95,775.21 -153.24,775.21 -131.53,753.5 -130.94,753.5 -130.12,752.69 -119.85,752.69 -119.03,753.5 1629.06,753.5 1747.57,635 1958,635 2101.18,491.82 J7.1
  Bottom Layer w39.37: C4.2 v2@-492.13,590.55
P29V0_CH: C3.2 J8.1 J8.3 L2.2 | length 5256.6
  Top Layer w118.11: -506.89,910 -442.48,974.41 -345.15,974.41 -337.37,966.63 -219.39,966.63 -216.31,969.71 -64.2,969.71 -39.37,944.88 -36.82,944.88 -23.94,932 211.15,932 284.15,1005 2445,1005 2525,925 2849,925 2937.78,1013.78 3887.8,1013.78 4291.34,610.24 4291.34,521.65 4330.71,482.28
  other v1: -551.18,826.77 -527.56,826.77 -541.34,846.46 -551.18,866.14 -527.56,868.11 -537.8,895.67 -551.18,915.35 -521.65,915.35
RFA: IC1.11 IC2.1 J7.7 | length 3078.7
  Top Layer w6: v2(-295,819) -279.9,803.9 -179.83,803.9 -173.72,810 -135,810 v2(-116,791) ; v2(-116,699) -103,712 1613.03,712 1801.18,523.85 J7.7
  Top Layer w10: v2(-413.39,1171.26) -413.39,1291.34 v2(-405.51,1299.21)
  Bottom Layer w6: IC1.11 -324.8,974.41 -324.69,974.41 -308.53,958.25 -308.53,906.07 -316.09,898.51 -316.09,877.2 -295.28,856.39 -295.28,819.28 v2(-295,819) ; v2(-116,699) v2(-116,791)
  Bottom Layer w10: v2(-413.39,1171.26) -413.39,1139.21 -446.04,1106.56 -446.04,1073.23 -432.68,1059.86 -420.1,1059.86 -407.46,1047.22 -320.31,1047.22 -320.31,978.91 -324.8,974.41 ; v2(-405.51,1299.21) -401.57,1303.15 IC2.1
RFB: IC2.6 J7.8 | length 3550.9
  Top Layer w6: v2@-438.19,793.91 -438.19,759.2 -487,710.39 -487,642.39 -526,603.39 -526,577.72 -515.28,567 -457,567 -418,606 -418,694 -365.47,746.53 -165.12,746.53 -142.59,724 -107.97,724 -107.15,724.82 1617.18,724.82 1852,490 1852,384.68 J7.8
  Top Layer w10: v2@-438.19,793.91 v2(-433.07,793.91)
  Bottom Layer w10: v2(-433.07,793.91) -435.85,796.69 -435.85,865.87 -442.74,872.75 -442.74,923.66 -418.13,948.26 -418.13,993.98 -436.2,1012.05 -436.2,1040.76 -462.04,1066.6 -462.04,1154.87 -420.05,1196.85 IC2.6
RFL_PWR: J1.10 J9.1 | length 7528.3
  Top Layer w7.87: J1.10 -695.5,948.77 -801.13,948.77 -826.77,974.41 -826.77,994.09 -782.65,1038.21 -672.95,1038.21 -567.24,1143.92 -505.6,1143.92 -496.13,1134.46 -478.63,1134.46 -477.68,1133.51 -397.75,1133.51 -396.81,1134.46 -337.21,1134.46 -324.8,1122.05 -275.59,1122.05 -265.75,1112.2 -246.06,1112.2 -226.75,1131.52 -132.48,1131.52 -76.94,1187.06 -76.94,1269.77 -15.77,1330.94 134.77,1330.94 202.83,1262.88 2437.91,1262.88 2599.84,1100.95 2745.59,1100.95 2907.52,1262.88 4682,1262.88 5393.7,551.18 5718.5,551.18 5751.18,518.5 J9.1
SCL: IC3.1 IC5.7 J1.9 J8.4 U1.5 | length 6487.9
  Top Layer w6: v2(-331,374) -296,374 v2(-285,385)
  Top Layer w10: J1.9 -787.4,852.24 -811.95,827.69 -811.95,563.56 -695.06,446.67 -594.31,446.67 -435.54,287.91 -429.35,287.91 -427.45,289.81 -408.55,289.81 -406.65,287.91 -357.53,287.91 -350.72,294.72 -318.57,294.72 -295.83,271.98 -295.83,262.35 -285.71,252.22 1133,252.22 1140.59,259.81 1249.45,259.81 1257.04,252.22 2481.22,252.22 2507,278 2507,413 2578.11,484.11 2760.52,484.11 2818.11,426.52 2818.11,273.77 2841.16,250.72 4256.62,250.72 4280.32,274.41 J8.4
  Bottom Layer w6: v2(-394,289) -393,289 -390.18,291.82 IC3.1 -362.4,342.6 v2(-331,374) ; v2(-285,385) -207.43,385 -205.62,383.19 -188.38,383.19 -186.57,385 -171.32,385 -154.32,368 IC5.7 ; v2(1164.6,259.6) U1.5
SDA: IC3.3 IC5.8 J1.4 J8.2 U1.4 | length 6965.5
  Top Layer w10: J1.4 -701.63,897.24 -738.22,933.83 -797.24,933.83 -827.95,903.13 -827.95,556.93 -701.69,430.67 -607.83,430.67 -443.35,266.19 -356.62,266.19 -344.09,278.72 -325.2,278.72 -311.83,265.35 -311.83,255.72 -292.33,236.22 2501,236.22 2543.89,279.11 2543.89,412.89 2599.11,468.11 2753.89,468.11 2802.11,419.89 2802.11,267.14 2834.53,234.72 4348.89,234.72 4380.32,266.14 J8.2
  Bottom Layer w6: v2(-418,267) -431,280 -431,355.57 -446.81,371.38 -446.81,388.62 -418.03,417.4 IC3.3 -356.72,417.4 -334.13,394.81 -322.38,394.81 -310.19,382.62 -310.19,370.87 -303.5,364.19 -276.38,364.19 -269.25,371.32 -210.72,371.32 -210.59,371.19 -183.41,371.19 -183.28,371.32 -179,371.32 -179,365.2 -174,360.2 IC5.8 ; U1.4 1239.4,236.82 1239.58,237 v2(1240,237)
SIGNAL_GND: J1.15 J9.4 | length 7343.2
  Top Layer w8: J1.15 -729.9,1024.28 -667.17,1024.28 -561.47,1129.98 -511.37,1129.98 -501.9,1120.52 -484.4,1120.52 -483.46,1119.57 -391.98,1119.57 -391.03,1120.52 -350.44,1120.52 -324.57,1094.65 -286.24,1094.65 -284.12,1092.52 -246.04,1092.52 -224.23,1114.33 -128.67,1114.33 -63,1180 -63,1264 -10,1317 129,1317 197.06,1248.94 2427,1248.94 2452.1,1223.84 2457.24,1223.84 2594.07,1087.02 2751.37,1087.02 2913.3,1248.94 4656.57,1248.94 5374.02,531.5 5659.45,531.5 5694.65,496.3 5694.65,367.64 5651.65,324.65 J9.4
VCC: IC1.14 IC2.5 J9.7 R7.1 | length 6748.1
  Top Layer w8: v2(-412.44,1082.67) -403.54,1091.57 -380.38,1091.57 -379.43,1092.52 -365.61,1092.52 -310.11,1037.02 -265.75,1037.02 -264.01,1038.76 -33.04,1038.76 -4.01,1009.73 143.59,1009.73 324.8,1190.94 2402.98,1190.94 2428.08,1165.84 2433.22,1165.84 2570.05,1029.02 2784.07,1029.02 2946,1190.94 4527.56,1190.94 5293.86,424.65 J9.7
  Bottom Layer w19.68: v2(-412.44,1082.67) -412.44,1101.56 -389.59,1124.41 IC1.14 -342.13,1124.41 -334.65,1131.89 IC2.5 -334.65,1216.35 -301.09,1249.91 -273.72,1249.91 -263.78,1259.84 R7.1
pads on no net: IC1.3 IC1.6 IC3.5 IC4.4 IC5.6 IC5.10 J6.1 J6.3 J6.7 J7.3 J7.4 J7.5 J7.6

## Polygon pours and split planes (outlines as drawn)
GND on Bottom Layer "Top-No Net" (solid, remove dead copper, pour order 2): -996.11,1466.54 6555.12,1466.54 6574.8,1446.85 6574.8,1181.1 6574.8,157.48 6535.43,118.11 6525.59,108.27 6190.94,108.27 -994.09,108.27 -1082.68,196.85
GND on Top Layer "Top-No Net" (solid, remove dead copper, pour order 0): -994.09,1496.06 6525.59,1496.06 6555.12,1466.54 6574.8,1446.85 6574.8,1181.1 6574.8,157.48 6535.43,118.11 6525.59,108.27 6190.94,108.27 -994.09,108.27 -1082.68,196.85

## Keep-outs
Keep-Out Layer:
  lines w3.94: -974.41,324.8 -974.41,433.07 -974.41,472.44 -974.41,1141.73 -974.41,1250 cw(c-856.3,1250) -856.3,1368.11 -59.06,1368.11 ccw(c-59.06,1387.8) -39.37,1387.8 cw(c-19.69,1387.8) -19.69,1407.48 ; -974.41,334.65 ccw(c-856.3,334.65) -856.3,216.54 -59.06,216.54 cw(c-59.06,196.85) -39.37,196.85 ccw(c-19.69,196.85) -19.69,177.17 157.48,177.17 ; -795,1368.11 -766.11,1397 -758,1397 -613,1397 -588,1372 -586,1372 ; -21.65,1407.48 155.51,1407.48 cw(c155.51,1387.8) 175.2,1387.8 ccw(c194.88,1387.8) 194.88,1368.11 3092.52,1368.11 ccw(c3092.52,1387.8) 3112.2,1387.8 cw(c3131.89,1387.8) 3131.89,1407.48 ; 155.51,177.17 ccw(c155.51,196.85) 175.2,196.85 cw(c194.88,196.85) 194.88,216.54 3090.55,216.54 cw(c3090.55,196.85) 3110.24,196.85 ccw(c3129.92,196.85) 3129.92,177.17 3307.09,177.17 ; 3129.92,1407.48 3307.09,1407.48 cw(c3307.09,1387.8) 3326.77,1387.8 ccw(c3346.46,1387.8) 3346.46,1368.11 4675.2,1368.11 ccw(c4675.2,1387.8) 4694.88,1387.8 cw(c4714.57,1387.8) 4714.57,1407.48 ; 3305.12,177.17 ccw(c3305.12,196.85) 3324.8,196.85 cw(c3344.49,196.85) 3344.49,216.54 4673.23,216.54 cw(c4673.23,196.85) 4692.91,196.85 ccw(c4712.6,196.85) 4712.6,177.17 4889.76,177.17 ; 4712.6,1407.48 4889.76,1407.48 cw(c4889.76,1387.8) 4909.45,1387.8 ccw(c4929.13,1387.8) 4929.13,1368.11 6240.16,1368.11 ccw(c6240.16,1387.8) 6259.84,1387.8 cw(c6279.53,1387.8) 6279.53,1407.48 6382.62,1407.48 cw(c6382.62,1303.88) 6486.22,1303.88 6486.22,1250 6486.22,1082.68 6338.58,1082.68 6279.53,1082.68 ccw(c6279.53,1062.99) 6259.84,1062.99 6259.84,984.25 6220.47,944.88 5826.77,944.88 5531.5,944.88 ccw(c5531.5,925.2) 5511.81,925.2 5511.81,836.61 5511.81,649.61 ccw(c5531.5,649.61) 5531.5,629.92 6161.42,629.92 6220.47,629.92 6259.84,590.55 6259.84,511.81 ccw(c6279.53,511.81) 6279.53,492.13 6338.58,492.13 6486.22,492.13 ; 4887.8,177.17 ccw(c4887.8,196.85) 4907.48,196.85 cw(c4927.17,196.85) 4927.17,216.54 6240.16,216.54 cw(c6240.16,196.85) 6259.84,196.85 ccw(c6279.53,196.85) 6279.53,177.17 ; 6279.53,177.17 6382.42,177.17 ; 6279.53,177.17 6382.42,177.17 ; 6382.42,177.17 ccw(c6382.42,280.96) 6486.22,280.96 6486.22,334.65 ; 6486.22,334.65 6486.22,334.65 ; 6486.22,334.65 6486.22,492.13 ; 6486.22,492.13 6486.22,492.13

## Other copper
Top Layer:
  rectangle net P29V0_CH: 4248,393.02 4412,489
  rectangle net P29V0_CH: -561.02,816.93 -504.92,935.04
  rectangle net GND: -29.53,1358.27 167.32,1407.48
  rectangle net GND: 3120.08,1338.58 3316.93,1407.48
  rectangle net GND: 6269.68,1358.27 6411,1407.48
  rectangle net GND: 6269.68,177.17 6418,231.21
  rectangle net GND: 4704.72,177.17 4901.57,236.22
  rectangle net GND: 3118.2,177.17 3305.12,212.81
  rectangle net GND: -29.53,177.17 157.48,216.54
  rectangle net GND: 4704.72,1358.27 4901.57,1407.48
  rectangle net GND: -78.74,393.7 255.91,551.18
  rectangle net GND: -75,268 275.59,393.7
  rectangle net GND: -826,1180 -558,1355
Bottom Layer:
  rectangle net GND: 6213,1285 6297,1354
  rectangle net GND: 6277,1259 6411,1358.27
  rectangle net GND: 6181,1094.92 6474.02,1302
  rectangle net GND: 6194,226.38 6416,331
  rectangle net GND: 6187,304 6476,472
  rectangle net GND: 4833,229 5241,530
  rectangle net GND: 4768,1051 5239,1356
  rectangle net GND: 2414,1031 2892,1356
  rectangle net GND: 2482,229 2850,523
  rectangle net FR_RST: -221.09,1081 -206,1103.56
  rectangle net P29V0_CH: -561.02,816.93 -472.44,925.2
  rectangle net GND: 4704.72,1328.74 4901.57,1407.48
  rectangle net GND: 3120.08,1338.58 3316.93,1407.48
  rectangle net GND: -29.53,1322.31 167.32,1407.48
  rectangle net GND: -29.53,177.17 157.48,265.75
  rectangle net GND: 4704.72,177.17 4901.57,275.59
  rectangle net GND: 6269.68,177.17 6416,226.38
  rectangle net GND: 6269.68,1358.27 6411,1407.48
  rectangle net GND: 3121.39,177.17 3307.09,205.11
  region net GND: 201.46,1023 201.46,1337.96 -74.13,1337.96 -74.13,1023
  region net GND: 201.46,235 201.46,549.96 -74.13,549.96 -74.13,235
  rectangle net GND: 2402.98,1190.94 2850,1310
  rectangle net GND: 2635,1081 2730,1231
  rectangle net GND: 2491.71,285.43 2849,388
  rectangle net GND: 2624.37,339.49 2719,514
  rectangle net GND: 182,1136 240,1255
  rectangle net GND: 184,340 225,523
  rectangle net GND: 4843,1191 5245,1321
  rectangle net GND: 4862,280 5208,406

## Silkscreen, mask and mechanical layers (free items; w line width, h text height)
Bottom Overlay:
  text "PA_Channel SUP CTRL v1.1" at 2359,715 h78.74
Top Solder:
  rectangle: -59.06,1368.11 177.17,1407.48
  rectangle: 3092.52,1368.11 3336.61,1407.48
  rectangle: 4675.2,1368.11 4911.42,1407.48
  rectangle: 6240.16,1356 6465,1407.48
  rectangle: 6250,167.32 6486.22,229
  rectangle: 4685.04,157.48 4921.26,216.54
  rectangle: 3100.39,167.32 3336.61,216.54
  rectangle: -59.06,167.32 196.85,216.54
Bottom Solder:
  rectangle: -59.06,1368.11 177.17,1407.48
  rectangle: 3092.52,1368.11 3336.61,1407.48
  rectangle: 4675.2,1368.11 4911.42,1407.48
  rectangle: 6240.16,1356 6464,1407.48
  rectangle: 6250,167.32 6486.22,229
  rectangle: 4685.04,157.48 4921.26,216.54
  rectangle: 3100.39,167.32 3336.61,216.54
  rectangle: -59.06,167.32 196.85,216.54
  rectangle: 2480.32,1062.99 2854.33,1368.11
  region: 2865.69,521.01 2491.67,521.01 2491.67,215.89 2865.69,215.89
  rectangle: -98.43,216.54 255.91,1368.11
Mechanical 1:
  lines w3.94: -974.41,324.8 -974.41,433.07 -974.41,472.44 -974.41,1141.73 -974.41,1250 cw(c-856.3,1250) -856.3,1368.11 -59.06,1368.11 ccw(c-59.06,1387.8) -39.37,1387.8 cw(c-19.69,1387.8) -19.69,1407.48 ; -974.41,334.65 ccw(c-856.3,334.65) -856.3,216.54 -59.06,216.54 cw(c-59.06,196.85) -39.37,196.85 ccw(c-19.69,196.85) -19.69,177.17 157.48,177.17 ; -21.65,1407.48 155.51,1407.48 cw(c155.51,1387.8) 175.2,1387.8 ccw(c194.88,1387.8) 194.88,1368.11 3092.52,1368.11 ccw(c3092.52,1387.8) 3112.2,1387.8 cw(c3131.89,1387.8) 3131.89,1407.48 ; 155.51,177.17 ccw(c155.51,196.85) 175.2,196.85 cw(c194.88,196.85) 194.88,216.54 3090.55,216.54 cw(c3090.55,196.85) 3110.24,196.85 ccw(c3129.92,196.85) 3129.92,177.17 3307.09,177.17 ; 3129.92,1407.48 3307.09,1407.48 cw(c3307.09,1387.8) 3326.77,1387.8 ccw(c3346.46,1387.8) 3346.46,1368.11 4675.2,1368.11 ccw(c4675.2,1387.8) 4694.88,1387.8 cw(c4714.57,1387.8) 4714.57,1407.48 ; 3305.12,177.17 ccw(c3305.12,196.85) 3324.8,196.85 cw(c3344.49,196.85) 3344.49,216.54 4673.23,216.54 cw(c4673.23,196.85) 4692.91,196.85 ccw(c4712.6,196.85) 4712.6,177.17 4889.76,177.17 ; 4712.6,1407.48 4889.76,1407.48 cw(c4889.76,1387.8) 4909.45,1387.8 ccw(c4929.13,1387.8) 4929.13,1368.11 6240.16,1368.11 ccw(c6240.16,1387.8) 6259.84,1387.8 cw(c6279.53,1387.8) 6279.53,1407.48 6380.9,1407.48 cw(c6380.9,1302.16) 6486.22,1302.16 6486.22,1250 6486.22,1082.68 6338.58,1082.68 6279.53,1082.68 ccw(c6279.53,1062.99) 6259.84,1062.99 6259.84,984.25 6220.47,944.88 5826.77,944.88 5531.5,944.88 ccw(c5531.5,925.2) 5511.81,925.2 5511.81,836.61 5511.81,649.61 ccw(c5531.5,649.61) 5531.5,629.92 6161.42,629.92 6220.47,629.92 6259.84,590.55 6259.84,511.81 ccw(c6279.53,511.81) 6279.53,492.13 6338.58,492.13 6486.22,492.13 ; 4887.8,177.17 ccw(c4887.8,196.85) 4907.48,196.85 cw(c4927.17,196.85) 4927.17,216.54 6240.16,216.54 cw(c6240.16,196.85) 6259.84,196.85 ccw(c6279.53,196.85) 6279.53,177.17 ; 6361.54,177.17 6279.53,177.17 ; 6485.94,281.1 cw(c6382,281.1) 6382,177.17 6279.53,177.17 ; 6486.22,281.1 6486.22,334.65 ; 6486.22,334.65 6486.22,334.65 ; 6486.22,334.65 6486.22,492.13 ; 6486.22,492.13 6486.22,492.13
Mechanical 2:
  circle w0.5: c390.29,103.27 r39.63
  circle w0.5: c3453.28,103.27 r39.63
  circle w0.5: c4110.76,1149.53 r39.63
  circle w0.5: c1921.79,103.27 r39.63
  circle w0.5: c6516.28,103.27 r39.63
  circle w0.5: c6368.64,334.57 r39.63
  circle w0.5: c4106.83,684.96 r39.63
  circle w0.5: c390.29,1481.22 r39.63
  circle w0.5: c6368.64,1249.92 r39.63
  circle w0.5: c69.43,398.54 r39.63
  circle w0.5: c4801.71,1249.92 r39.63
  circle w0.5: c-1160.89,792.24 r39.63
  circle w0.5: c5030.06,1249.92 r39.63
  circle w0.5: c3455.25,1249.92 r39.63
  circle w0.5: c3455.25,334.57 r39.63
  circle w0.5: c-688.44,305.05 r118.11
  circle w0.5: c3219.03,334.57 r39.63
  circle w0.5: c4984.78,1481.22 r39.63
  circle w0.5: c-1141.2,1481.22 r39.63
  circle w0.5: c-688.44,1289.3 r118.11
  circle w0.5: c-1141.2,103.27 r39.63
  circle w0.5: c3219.03,1249.92 r39.63
  circle w0.5: c325.33,334.57 r39.63
  circle w0.5: c4801.71,334.57 r39.63
  circle w0.5: c325.33,1249.92 r39.63
  circle w0.5: c3453.28,1481.22 r39.63
  circle w0.5: c4984.78,103.27 r39.63
  circle w0.5: c69.43,1185.94 r39.63
  circle w0.5: c5030.06,334.57 r39.63
  circle w0.5: c6516.28,1481.22 r39.63
  circle w0.5: c1921.79,1481.22 r39.63
  lines w0.39: 5029.53,1206 5029.53,1250 5083.53,1250